# Altium PCB PCB1.PcbDoc
Units mm, origin at the board's own origin, x right, y up, seen from the top; angles counter-clockwise.
Board outline 90 x 90 mm, 4 copper layers (Top Layer, Internal Plane 1, Internal Plane 2, Bottom Layer), stack 0.462 mm thick; 35 components, 34 nets, 226 pads, 25 vias.
Unrouted connection lines stored in the file: 94.
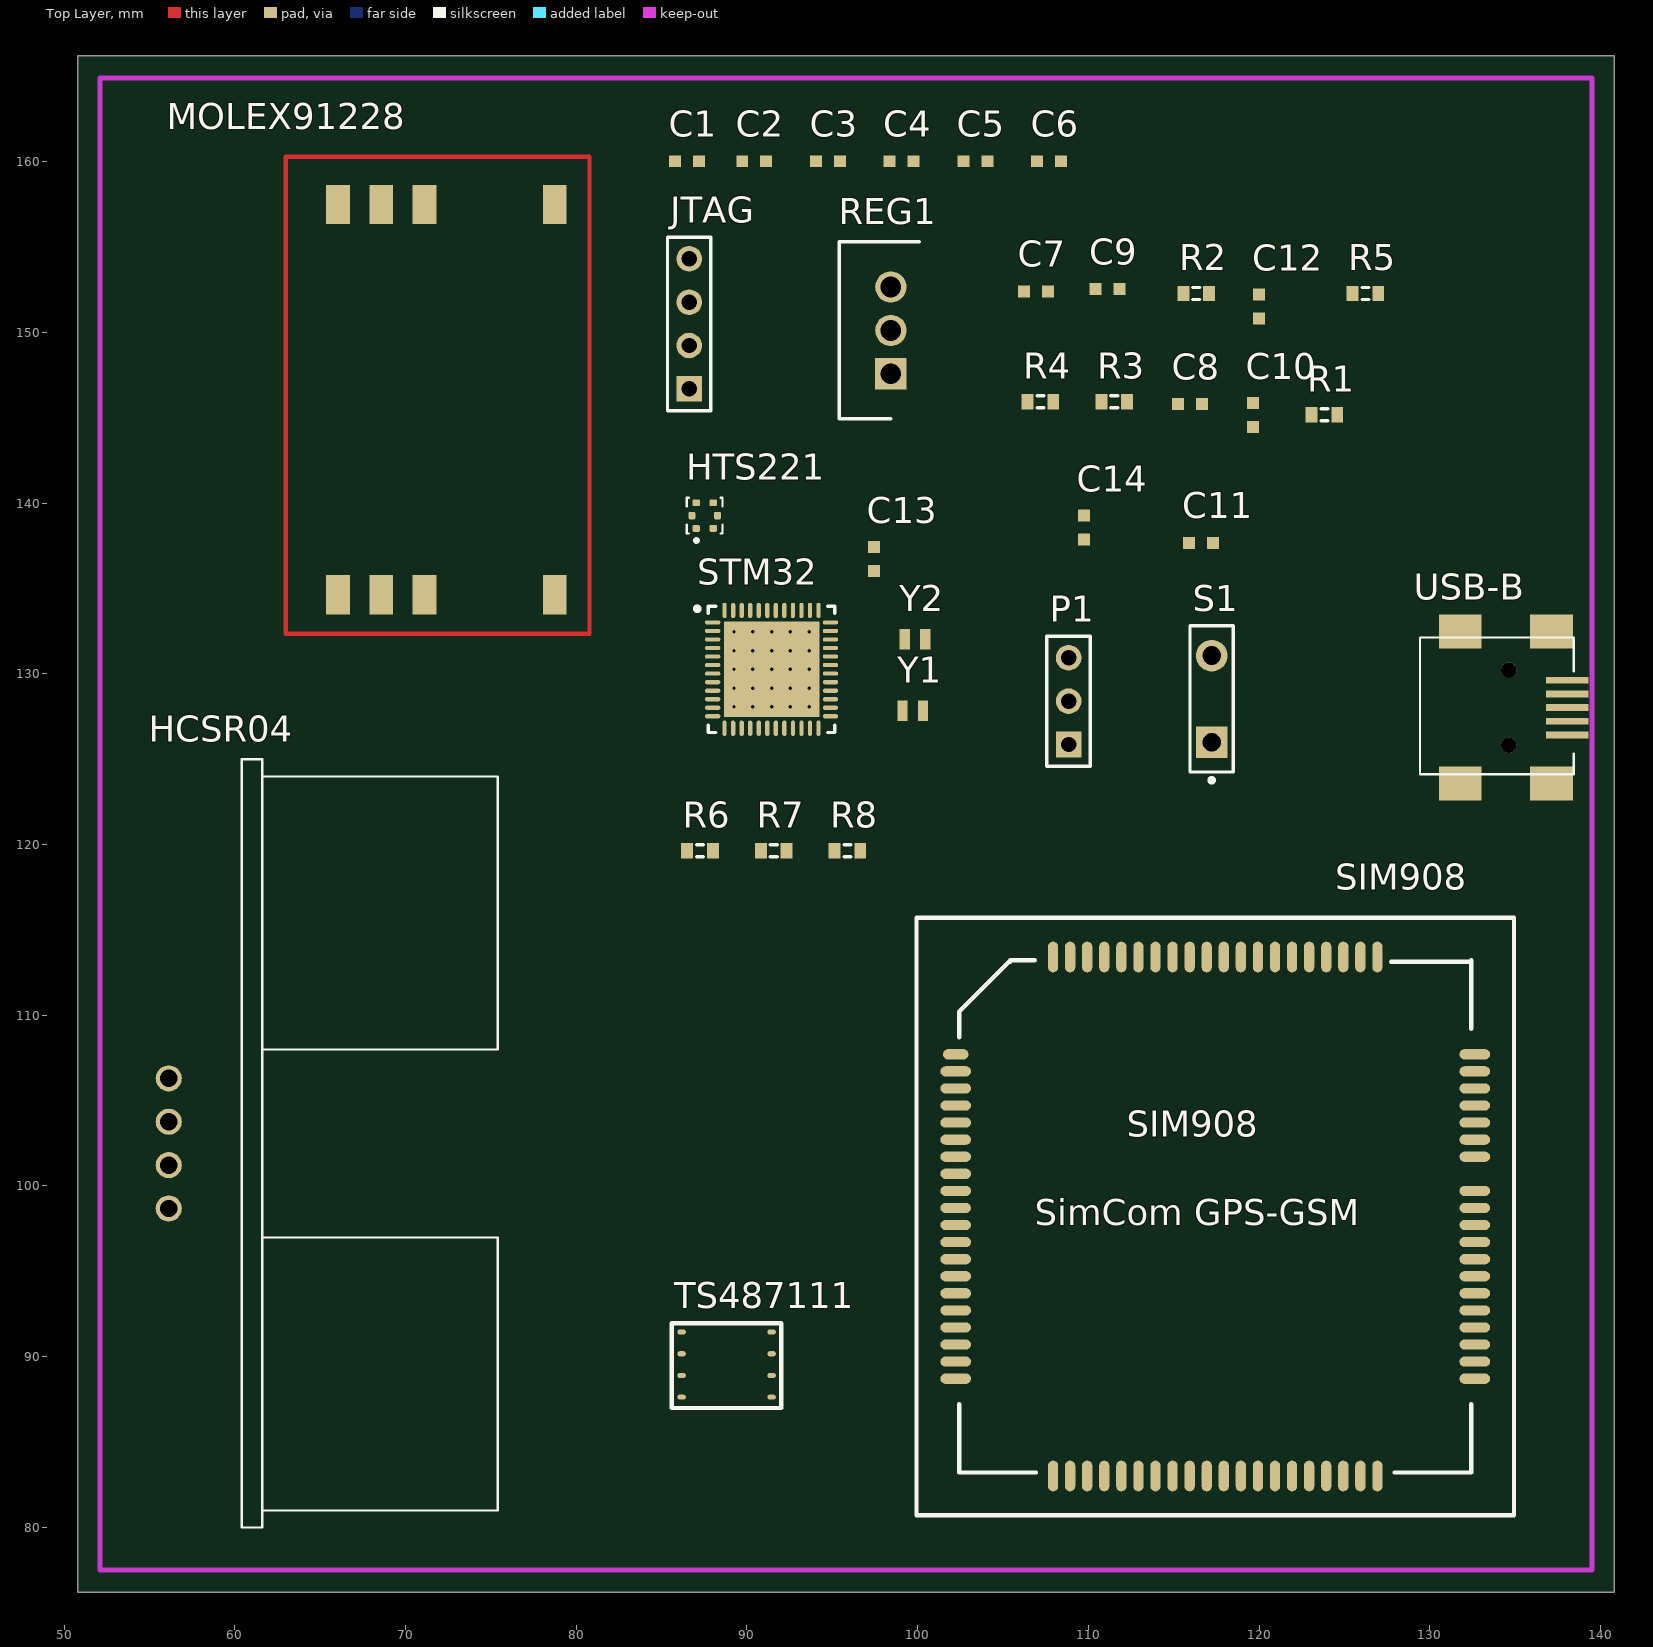
[diagram p0: Top Layer view]
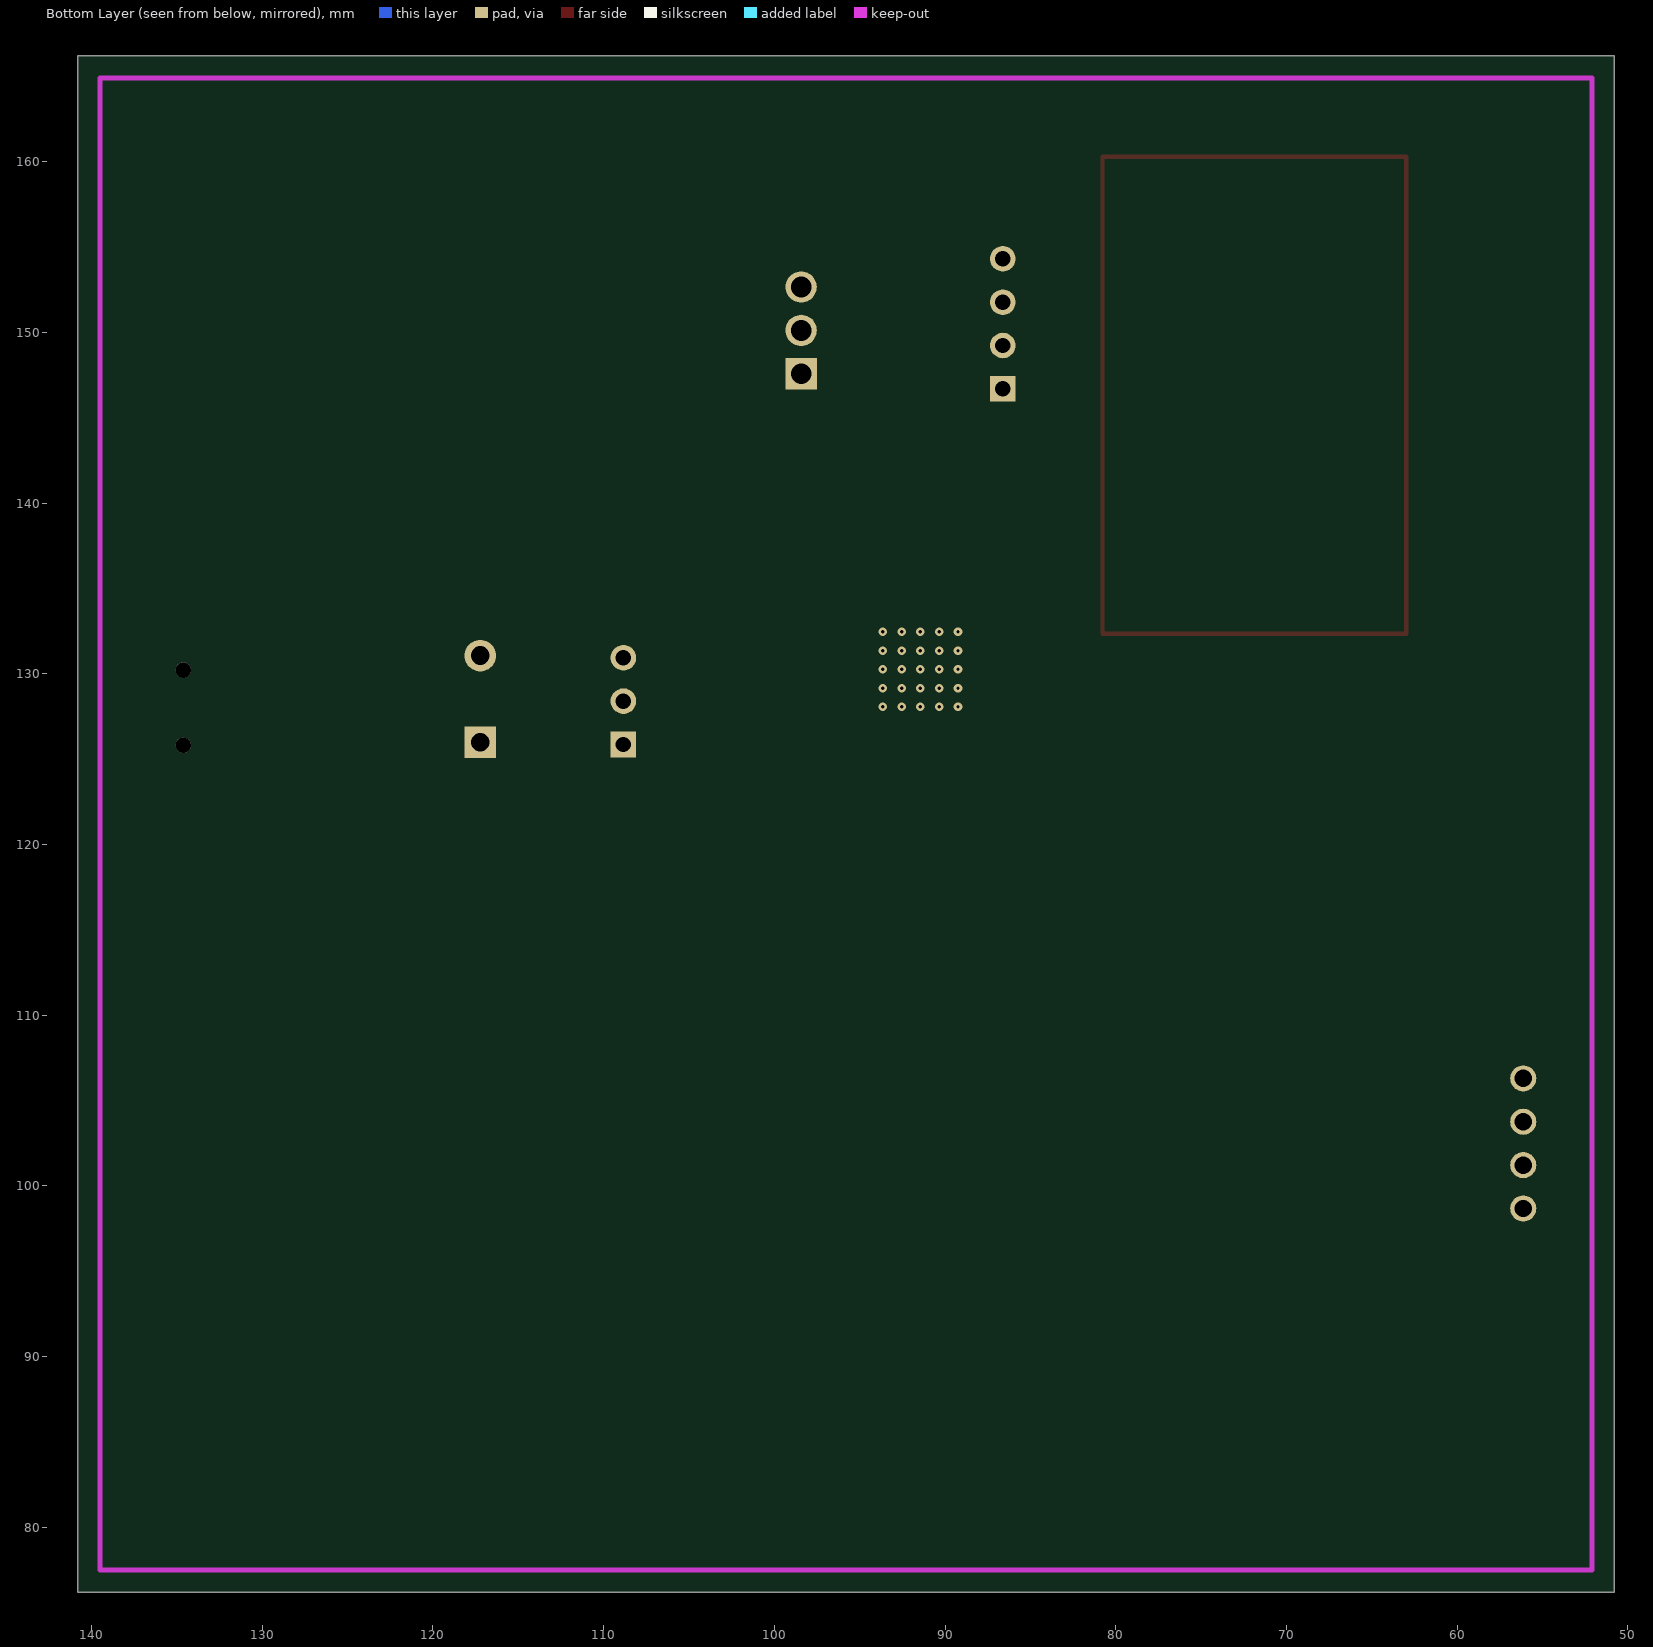
[diagram p1: Bottom Layer view, seen from below]
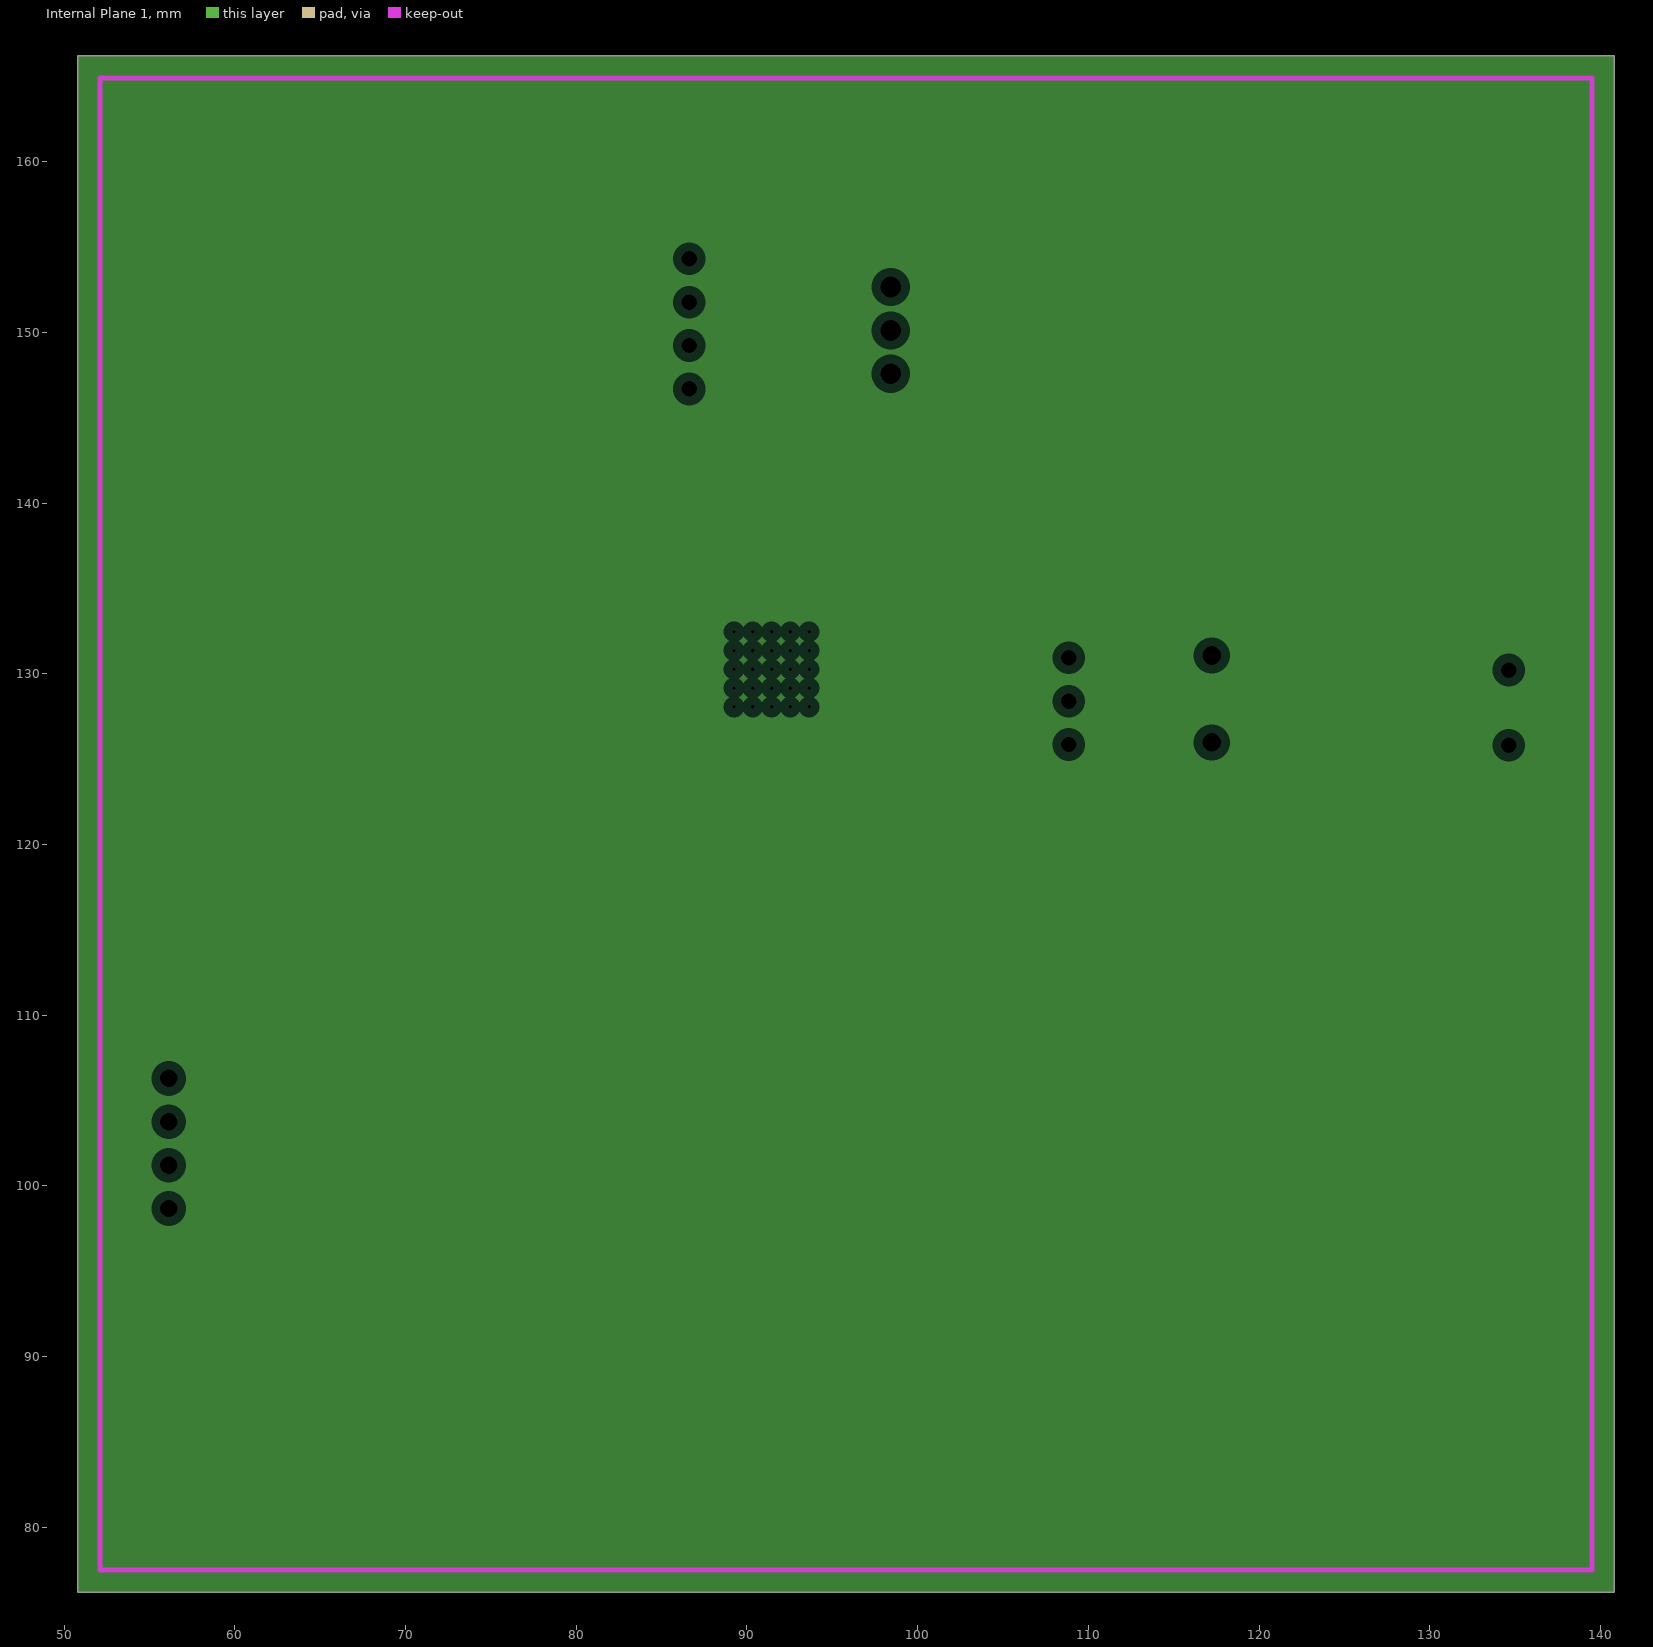
[diagram p2: Internal Plane 1, clearances drawn from the general rule]
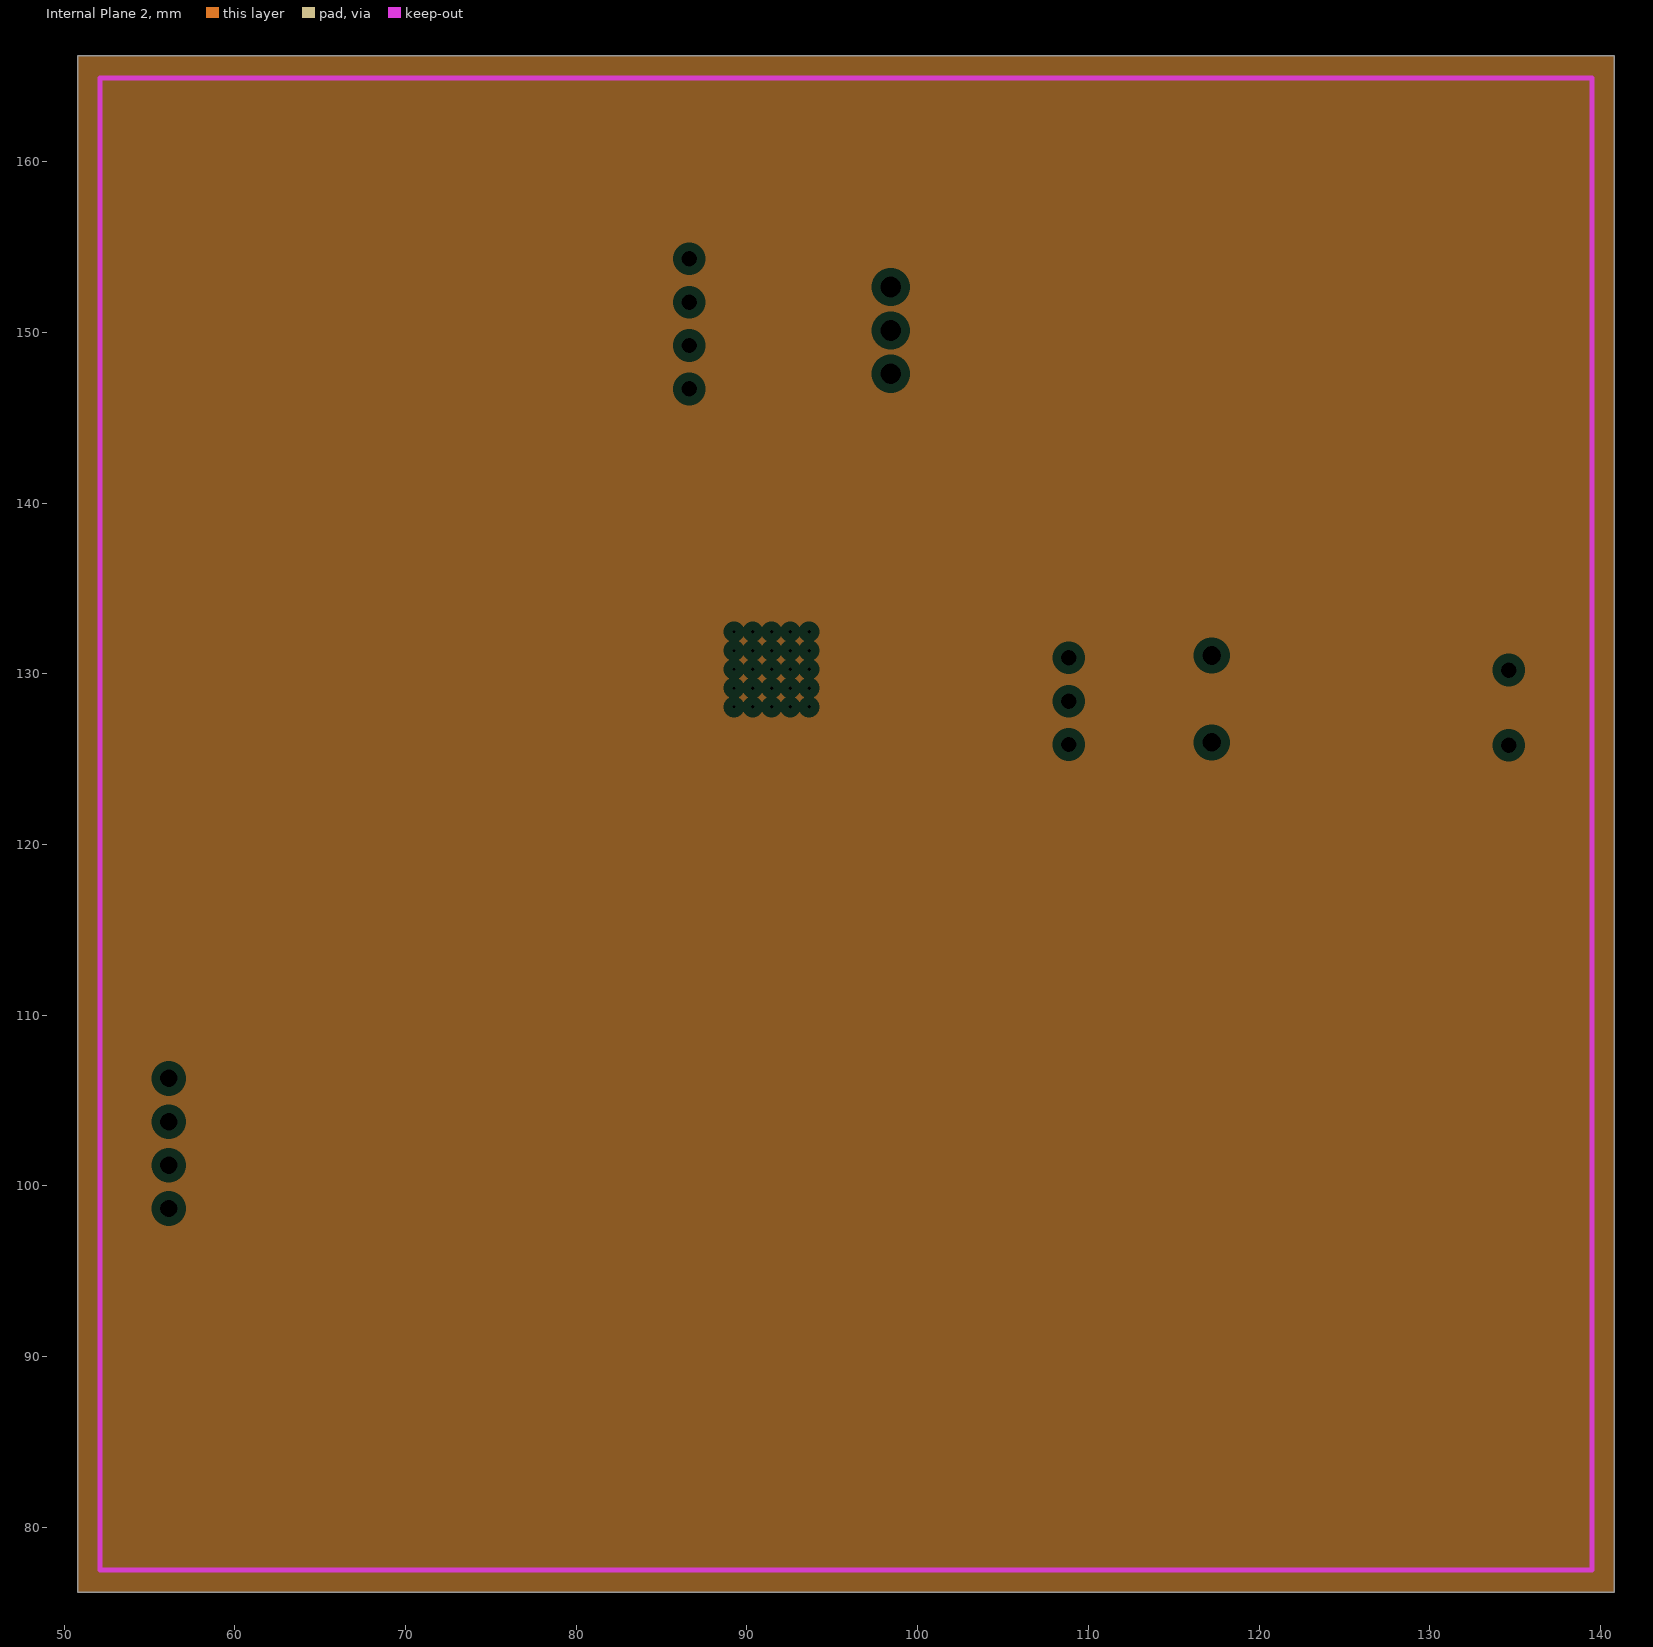
[diagram p3: Internal Plane 2, clearances drawn from the general rule]

## Layer stack, top to bottom
Top Solder: solder mask 0.0102, Solder Resist, Dk 3.5
Top Layer: signal copper 0.0356
Internal Plane 1: plane copper 0.0356
Internal Plane 2: plane copper 0.0356
Dielectric 1: dielectric 0.32, FR-4, Dk 4.8
Bottom Layer: signal copper 0.0356
Bottom Solder: solder mask 0.0102, Solder Resist, Dk 3.5

## Board outline
50.8,76.2 140.8,76.2 140.8,166.2 50.8,166.2

## Design rules (kind name [scope] priority, off if disabled: settings)
Clearance [All] p1: gap=0.2
PlaneClearance [All] p1: clearance=0.508
PlaneConnect [All] p1: planeconnectstyle=Relief reliefexpansion=0.508 reliefentries=4 reliefconductorwidth=0.254 reliefairgap=0.254
PolygonConnect [All] p1: connectstyle=Relief reliefconductorwidth=0.254 reliefentries=4 polygonreliefangle="90 Angle" airgapwidth=0.254
RoutingVias [All] p1: holewidth=0.6 width=1 viastyle="Through Hole" minholewidth=0.711 minwidth=1.27 maxholewidth=0.711 maxwidth=1.27
SolderMaskExpansion [All] p1: expansion=0.102
Width [All] p1: maxlimit=0.2 minlimit=0.2 preferedwidth=0.2
28 further rules are at their usual default settings.

## Components (designator, comment, footprint, x,y, rotation, side; value= is the part's Value field where it differs from the comment)
C1 "CGJ3E3C0G2D101J080AA" CAP_CGJ3E3C0G2D101J080AA 86.487,160.02 r0 top
C2 "CGJ3E3C0G2D101J080AA" CAP_CGJ3E3C0G2D101J080AA 90.424,160.02 r0 top
C3 "CGJ3E3C0G2D101J080AA" CAP_CGJ3E3C0G2D101J080AA 94.742,160.02 r0 top
C4 "CGJ3E3C0G2D101J080AA" CAP_CGJ3E3C0G2D101J080AA 99.06,160.02 r0 top
C5 "CGJ3E3C0G2D101J080AA" CAP_CGJ3E3C0G2D101J080AA 103.378,160.02 r0 top
C6 "CGJ3E3C0G2D101J080AA" CAP_CGJ3E3C0G2D101J080AA 107.696,160.02 r0 top
C7 "CGJ3E3C0G2D101J080AA" CAP_CGJ3E3C0G2D101J080AA 106.934,152.4 r0 top
C8 "CGJ3E3C0G2D101J080AA" CAP_CGJ3E3C0G2D101J080AA 115.951,145.796 r0 top
C9 "CGJ3E3C0G2D101J080AA" CAP_CGJ3E3C0G2D101J080AA 111.125,152.527 r0 top
C10 "CGJ3E3C0G2D101J080AA" CAP_CGJ3E3C0G2D101J080AA 119.634,145.161 r90 top
C11 "CGJ3E3C0G2D101J080AA" CAP_CGJ3E3C0G2D101J080AA 116.586,137.668 r0 top
C12 "CGJ3E3C0G2D101J080AA" CAP_CGJ3E3C0G2D101J080AA 120.003,151.511 r90 top
C13 "CGJ3E3C0G2D101J080AA" CAP_CGJ3E3C0G2D101J080AA 97.43,136.724 r90 top
C14 "CGJ3E3C0G2D101J080AA" CAP_CGJ3E3C0G2D101J080AA 109.728,138.557 r90 top
HCSR04 "HC-SR04" XCVR_HC-SR04 56.134,102.489 r90 top
HTS221 "HTS221" XDCR_HTS221 87.524,139.264 r90 top
JTAG "Header 4" HDR1X4 86.614,146.685 r90 top
MOLEX91228 "MOLEX91228A" PCBComponent_1 65.532,142.494 r90 top
P1 "Header 3" HDR1X3 108.839,125.857 r90 top
R1 "Res3" J1-0603 123.825,145.161 r0 top
R2 "Res3" J1-0603 116.32,152.273 r0 top
R3 "Res3" J1-0603 111.506,145.923 r0 top
R4 "Res3" J1-0603 107.188,145.923 r0 top
R5 "Res3" J1-0603 126.226,152.273 r0 top
R6 "Res3" J1-0603 87.249,119.634 r0 top
R7 "Res3" J1-0603 91.567,119.634 r0 top
R8 "Res3" J1-0603 95.885,119.634 r0 top
REG1 "LM317KC" TO254P470X1016X1965-3P 98.425,147.574 r90 top
S1 "SW-PB" SPST-2 117.221,128.524 r90 top
SIM908 "SIM908" "Sim 908" 822.706,1046.099 r0 top
STM32 "STM32F401CBU6" STM-UFQFPN48_N 91.44,130.259 r0 top
TS487111 "TS487111" TS4871B 86.233,88.646 r90 top
USB-B "USB connector" usb_B 134.62,128.016 r0 top
Y1 "CM9V-T1A-32.768KHZ-7PF-20PPM-TA-QC" XTAL_CM9V-T1A-32.768KHZ-7PF-20PPM-TA-QC 99.716,127.834 r0 top
Y2 "CM9V-T1A-32.768KHZ-7PF-20PPM-TA-QC" XTAL_CM9V-T1A-32.768KHZ-7PF-20PPM-TA-QC 99.843,132.025 r0 top

## Footprints (in the part's own frame and the unit in brackets; to place one, negate y for a bottom-side part, rotate by r counter-clockwise, add the part's x,y. Pads: shape width x height; smd on the part's side, far side on the other; paste and mask are expansions set on the pad)
CAP_CGJ3E3C0G2D101J080AA [mm]
  rect 0.7x0.7 smd: 1(-0.7,0) 2(0.7,0)
  body extent -0.8,-0.4 0.8,0.4, height 0.9
HDR1X3 [mm] "Connector; Header; 3 Position"
  rect 1.5x1.5 hole 0.9: 1(0,0)
  round 1.5 hole 0.9: 2(2.54,0) 3(5.08,0)
  silkscreen extent -1.27,-1.27 6.35,1.27
HDR1X4 [mm] "Connector; Header; 4 Position"
  rect 1.5x1.5 hole 0.9: 1(0,0)
  round 1.5 hole 0.9: 2(2.54,0) 3(5.08,0) 4(7.62,0)
  silkscreen extent -1.27,-1.27 8.89,1.27
J1-0603 [mm] "Chip Resistor, Body 1.6x0.8mm, IPC High Density"
  rect 0.7x0.9 smd: 1(-0.75,0) 2(0.75,0)
  silkscreen extent -0.2,-0.35 0.2,0.35, body extent -0.85,-0.48 0.85,0.48, height 0.9
PCBComponent_1 [mm]
  rect 2.3x1.4 smd: 1(-7.874,-0.508) 2(-7.874,-3.048) 3(-7.874,-5.588) 4(-7.874,-13.208) 5(14.986,-0.508) 6(14.986,-3.048) 7(14.986,-5.588) 8(14.986,-13.208)
  Top Layer lines w0.254: -10.16,2.54 17.78,2.54 17.78,-15.24 -10.16,-15.24 -10.16,2.54
  body extent -13.56,-15.24 18.64,9.76, height 3.1
"Sim 908" [mm]
  oval 1.5x0.6 smd: 1(-720.478,-938.388)
  oval 1.8x0.6 smd: 2(-720.478,-939.388) 3(-720.478,-940.388) 4(-720.478,-941.388) 5(-720.478,-942.388) 6(-720.478,-943.388) 7(-720.478,-944.388) 8(-720.478,-945.388) 9(-720.478,-946.388) 10(-720.478,-947.388) 11(-720.478,-948.388) 12(-720.478,-949.388) 13(-720.478,-950.388) 14(-720.478,-951.388) 15(-720.478,-952.388) 16(-720.478,-953.388) 17(-720.478,-954.388) 18(-720.478,-955.388) 19(-720.478,-956.388) 20(-720.478,-957.388) 41(-690.078,-957.388) 42(-690.078,-956.388) 43(-690.078,-955.388) 44(-690.078,-954.388) 45(-690.078,-953.388) 46(-690.078,-952.388) 47(-690.078,-951.388) 48(-690.078,-950.388) 49(-690.078,-949.388) 50(-690.078,-948.388) 51(-690.078,-947.388) 52(-690.078,-946.388) 54(-690.078,-944.388) 55(-690.078,-943.388) 56(-690.078,-942.388) 57(-690.078,-941.388) 58(-690.078,-940.388) 59(-690.078,-939.388) 60(-690.078,-938.388)
  oval 0.6x1.8 smd: 21(-714.778,-963.088) 22(-713.778,-963.088) 23(-712.778,-963.088) 24(-711.778,-963.088) 25(-710.778,-963.088) 26(-709.778,-963.088) 27(-708.778,-963.088) 28(-707.778,-963.088) 29(-706.778,-963.088) 30(-705.778,-963.088) 31(-704.778,-963.088) 32(-703.778,-963.088) 33(-702.778,-963.088) 34(-701.778,-963.088) 35(-700.778,-963.088) 36(-699.778,-963.088) 37(-698.778,-963.088) 38(-697.778,-963.088) 39(-696.778,-963.088) 40(-695.778,-963.088) 61(-695.778,-932.688) 62(-696.778,-932.688) 63(-697.778,-932.688) 64(-698.778,-932.688) 65(-699.778,-932.688) 66(-700.778,-932.688) 67(-701.778,-932.688) 68(-702.778,-932.688) 69(-703.778,-932.688) 70(-704.778,-932.688) 71(-705.778,-932.688) 72(-706.778,-932.688) 73(-707.778,-932.688) 74(-708.778,-932.688) 75(-709.778,-932.688) 76(-710.778,-932.688) 77(-711.778,-932.688) 78(-712.778,-932.688) 79(-713.778,-932.688) 80(-714.778,-932.688)
  round 0 smd: 53(-727.964,-925.449)
  silkscreen extent -722.78,-965.39 -687.78,-930.39, body extent -720.04,-963.04 -690.04,-933.04, height 0.89
SPST-2 [mm] "Switch; 2 Leads"
  rect 1.85x1.85 hole 1.1: 1(-2.54,0)
  round 1.85 hole 1.1: 2(2.54,0)
  silkscreen extent -4.89,-1.27 4.28,1.27
STM-UFQFPN48_N [mm] "QFN, 48-Leads, Body 7.1x7.1mm, Pitch 0.5mm, Thermal Pad 5.6x5.6mm, IPC Medium Density"
  oval 0.9x0.25 smd: 1(-3.45,2.75) 2(-3.45,2.25) 3(-3.45,1.75) 4(-3.45,1.25) 5(-3.45,0.75) 6(-3.45,0.25) 7(-3.45,-0.25) 8(-3.45,-0.75) 9(-3.45,-1.25) 10(-3.45,-1.75) 11(-3.45,-2.25) 12(-3.45,-2.75) 25(3.45,-2.75) 26(3.45,-2.25) 27(3.45,-1.75) 28(3.45,-1.25) 29(3.45,-0.75) 30(3.45,-0.25) 31(3.45,0.25) 32(3.45,0.75) 33(3.45,1.25) 34(3.45,1.75) 35(3.45,2.25) 36(3.45,2.75)
  oval 0.25x0.9 smd: 13(-2.75,-3.45) 14(-2.25,-3.45) 15(-1.75,-3.45) 16(-1.25,-3.45) 17(-0.75,-3.45) 18(-0.25,-3.45) 19(0.25,-3.45) 20(0.75,-3.45) 21(1.25,-3.45) 22(1.75,-3.45) 23(2.25,-3.45) 24(2.75,-3.45) 37(2.75,3.45) 38(2.25,3.45) 39(1.75,3.45) 40(1.25,3.45) 41(0.75,3.45) 42(0.25,3.45) 43(-0.25,3.45) 44(-0.75,3.45) 45(-1.25,3.45) 46(-1.75,3.45) 47(-2.25,3.45) 48(-2.75,3.45)
  rect 5.6x5.6 smd: 49(0,0)
  silkscreen extent -4.47,-3.7 3.7,3.7, body extent -3.55,-3.55 3.55,3.55, height 0.6
TO254P470X1016X1965-3P [mm]
  rect 1.83x1.83 / inner round 1.83 / far side rect 1.83x1.83 hole 1.22: 1(0,0)
  round 1.83 hole 1.22: 2(2.54,0) 3(5.08,0)
  silkscreen extent -2.64,-1.68 7.72,3.03
TS4871B [mm] "TS4871B"
  oval 0.3x0.5 smd: 1(-1.016,0.063) 1(0.254,0.064) 1(1.524,0.064) 1(2.794,0.064) 5(-1.016,-5.207) 6(0.254,-5.207) 7(1.524,-5.207) 8(2.794,-5.207)
  silkscreen extent -1.65,-5.78 3.3,0.64, body extent -1.56,-5.6 3.34,0.4, height 1.75
usb_B [mm]
  rect 2.5x2 smd: 0(-2.848,-4.45) 0(-2.848,4.45) 0(2.502,-4.45) 0(2.502,4.45)
  rect 2.5x0.4 smd: 1(3.427,1.6) 2(3.427,0.8) 3(3.427,0) 4(3.427,-0.8) 5(3.427,-1.6)
  round 0.9 hole 0.9 unplated: 6(0.002,-2.2) 6(0.002,2.2)
  silkscreen extent -5.2,-3.9 3.8,4.1, body extent -5.84,-4.95 3.16,4.95, height 3.96
XCVR_HC-SR04 [mm]
  round 1.53 hole 1.02: 1(-3.81,0) 2(-1.27,0) 3(1.27,0) 4(3.81,0)
  silkscreen extent -22.5,-19.27 22.5,-4.27, body extent -22.5,-26.1 22.5,1.43, height 7.55
XDCR_HTS221 [mm]
  rrect50% 0.4x0.45 smd: 1(-0.75,0.5) 2(-0.75,-0.5) 4(0.75,-0.5) 5(0.75,0.5)
  rrect50% 0.45x0.4 smd: 3(0,-0.75) 6(0,0.75)
  silkscreen extent -1.56,-1.05 1.05,1.05, body extent -1,-1 1,1, height 1
XTAL_CM9V-T1A-32.768KHZ-7PF-20PPM-TA-QC [mm]
  rect 0.6x1.2 smd: 1(-0.6,0) 2(0.6,0)
  body extent -0.8,-0.5 0.8,0.5, height 0.5

## Part data
C1 C2 C3 C4 C5 C6 C7 C8 C9 C10 C11 C12 C13 C14: "High Reliability - Autograde Plus+ / 7 (180mm)"
HCSR04: "Ultrasonic Sensor Module"
HTS221: "Humidity Temperature Sensor 0 ~ 100% RH I²C, SPI ±4.5% RH 10 s Surface Mount"
JTAG: "Header, 4-Pin"
MOLEX91228 TS487111: library part Component_1
P1: "Header, 3-Pin"
R1 R2 R3 R4 R5 R6 R7 R8: "Resistor"
REG1: "Linear Voltage Regulators 3-Term Adj. Pos."
S1: "Switch"
STM32: "ARM Cortex-M4 32-bit MCU+FPU, 105 DMIPS, 128 kB Flash, 64 kB Internal RAM, 36 I/Os, 48-pin UFQFPN, -40 to 85 degC, Tray"
USB-B: library part USB-B, "USB-B"
Y1 Y2: "Tuning Fork Crystal 32.768kHz in 1.0x 1.6mm package"

## Via types
v1: diameter 0.5, hole 0.2, Top Layer to Bottom Layer, 25 vias

## Nets (pads, with @x,y where several pads share a name; then routed paths per layer and width w, separated by ;. In a path a pad name is that pad's centre, name@x,y a point inside that pad or via, vN(x,y) a via of type N, cw(c..) or ccw(c..) an arc to the next point about the centre after c; other vN are vias at no path point)
3.3V: C1.2 C2.2 C3.2 C4.2 C5.2 C6.2
5V: USB-B.1
GND: C1.1 C2.1 C3.1 C4.1 C5.1 C6.1 C7.2 C8.1 C9.2 C10.1 C11.1 C12.1 C13.1 C14.2 HCSR04.4 HTS221.5 JTAG.1 MOLEX91228.5 MOLEX91228.8 P1.2 P1.3 R5.1 REG1.1 S1.1 STM32.23 STM32.35 STM32.47 TS487111.7 USB-B.0 USB-B.4 USB-B.5
NetC7_1: C7.1 STM32.4 Y1.1
NetC8_2: C8.2 STM32.5 Y2.1
NetC9_1: C9.1 STM32.3 Y1.2
NetC10_2: C10.2 STM32.6 Y2.2
NetC11_2: C11.2 R2.2 S1.2 STM32.7
NetC12_2: C12.2
NetC13_2: C13.2 R6.2 SIM908.17
NetC14_1: C14.1 MOLEX91228.2 R8.1
NetHCSR04_2: HCSR04.2 STM32.38
NetHCSR04_3: HCSR04.3 STM32.29
NetHTS221_2: HTS221.2 STM32.15
NetHTS221_3: HTS221.3 STM32.16
NetHTS221_4: HTS221.4 STM32.17
NetHTS221_6: HTS221.6 SIM908.68 STM32.30
NetJTAG_2: JTAG.2 STM32.37
NetJTAG_3: JTAG.3 STM32.34
NetMOLEX91228_1: MOLEX91228.1 SIM908.20
NetMOLEX91228_3: MOLEX91228.3 R7.1
NetMOLEX91228_4: MOLEX91228.4
NetMOLEX91228_6: MOLEX91228.6 R6.1
NetP1_1: P1.1 REG1.2 SIM908.62 SIM908.63 STM32.1
NetR1_2: R1.2 STM32.33 USB-B.3
NetR3_1: R3.1 TS487111.1
NetR4_1: R4.1 R5.2
NetR4_2: R4.2 SIM908.22 STM32.11 TS487111.5
NetR7_2: R7.2 SIM908.19
NetR8_2: R8.2 SIM908.18
NetSIM908_21: SIM908.21 TS487111.8
NetSIM908_71: SIM908.71 STM32.31
NetSTM32_32: STM32.32 USB-B.2
VCC: HCSR04.1 HTS221.1 JTAG.4 R1.1 R2.1 R3.2 REG1.3 STM32.24 STM32.36 STM32.48 TS487111.6
pads on no net: MOLEX91228.7 SIM908.1 SIM908.2 SIM908.3 SIM908.4 SIM908.5 SIM908.6 SIM908.7 SIM908.8 SIM908.9 SIM908.10 SIM908.11 SIM908.12 SIM908.13 SIM908.14 SIM908.15 SIM908.16 SIM908.23 SIM908.24 SIM908.25 SIM908.26 SIM908.27 SIM908.28 SIM908.29 SIM908.30 SIM908.31 SIM908.32 SIM908.33 SIM908.34 SIM908.35 SIM908.36 SIM908.37 SIM908.38 SIM908.39 SIM908.40 SIM908.41 SIM908.42 SIM908.43 SIM908.44 SIM908.45 SIM908.46 SIM908.47 SIM908.48 SIM908.49 SIM908.50 SIM908.51 SIM908.52 SIM908.53 SIM908.54 SIM908.55 SIM908.56 SIM908.57 SIM908.58 SIM908.59 SIM908.60 SIM908.61 SIM908.64 SIM908.65 SIM908.66 SIM908.67 SIM908.69 SIM908.70 SIM908.72 SIM908.73 SIM908.74 SIM908.75 SIM908.76 SIM908.77 SIM908.78 SIM908.79 SIM908.80 STM32.2 STM32.8 STM32.9 STM32.10 STM32.12 STM32.13 STM32.14 STM32.18 STM32.19 STM32.20 STM32.21 STM32.22 STM32.25 STM32.26 STM32.27 STM32.28 STM32.39 STM32.40 STM32.41 STM32.42 STM32.43 STM32.44 STM32.45 STM32.46 STM32.49 USB-B.6
copper on no net:
  other v1: 89.24,128.059 90.34,128.059 91.44,128.059 92.54,128.059 93.64,128.059 89.24,129.159 90.34,129.159 91.44,129.159 92.54,129.159 93.64,129.159 89.24,130.259 90.34,130.259 91.44,130.259 92.54,130.259 93.64,130.259 89.24,131.359 90.34,131.359 91.44,131.359 92.54,131.359 93.64,131.359 89.24,132.459 90.34,132.459 91.44,132.459 92.54,132.459 93.64,132.459

## Keep-outs
Keep-Out Layer:
  lines w0.3: 52.1,77.5 52.1,164.9 139.5,164.9 139.5,77.5 52.1,77.5

## Dimensions
52.1,77.5 to 52.1,164.9 on Mechanical 1
52.1,77.5 to 139.5,77.5 on Mechanical 1

## Text inside footprints (layer, text, board x,y; h text height)
SIM908: Top Overlay "SimCom GPS-GSM" at 106.852,97.711 h1.52